# Altium PCB Battlebot_Controller.PcbDoc
Units mm, origin at the board's own origin, x right, y up, seen from the top; angles counter-clockwise.
Board outline 92.71 x 59.94 mm, 2 copper layers (Top Layer, Bottom Layer); 13 components, 19 nets, 70 pads, 26 vias.
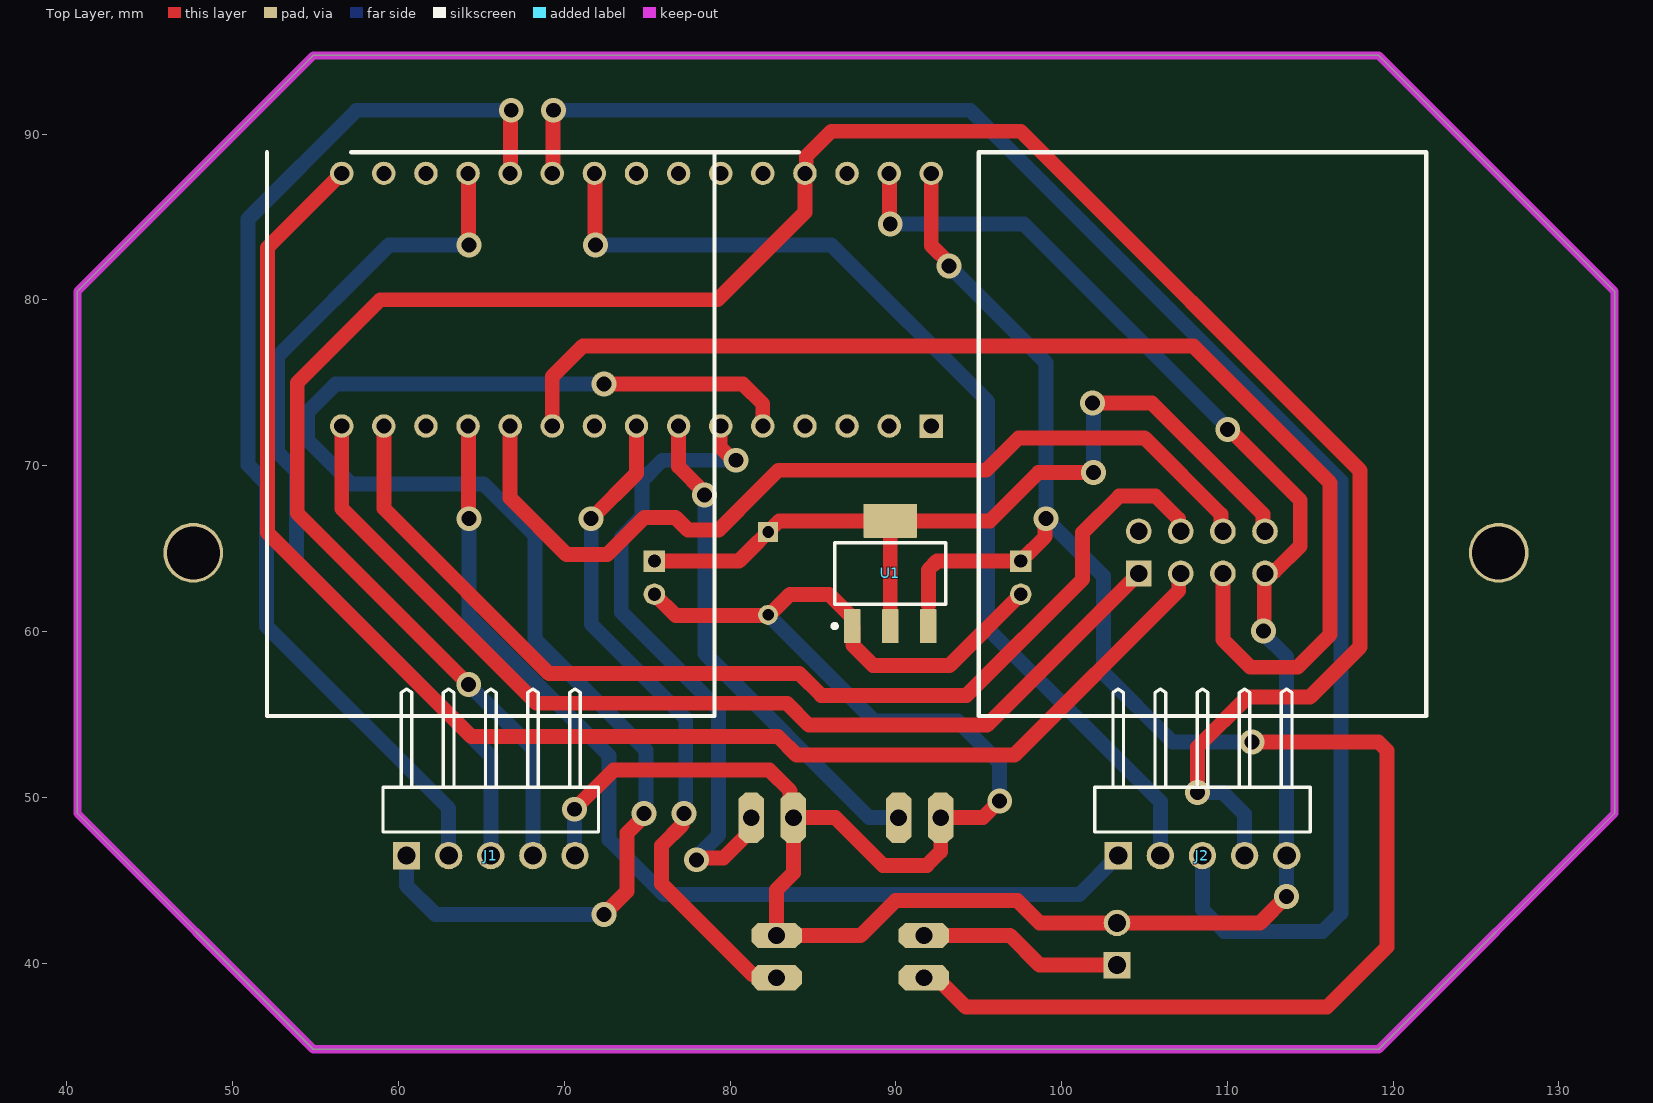
[diagram p0: Top Layer view]
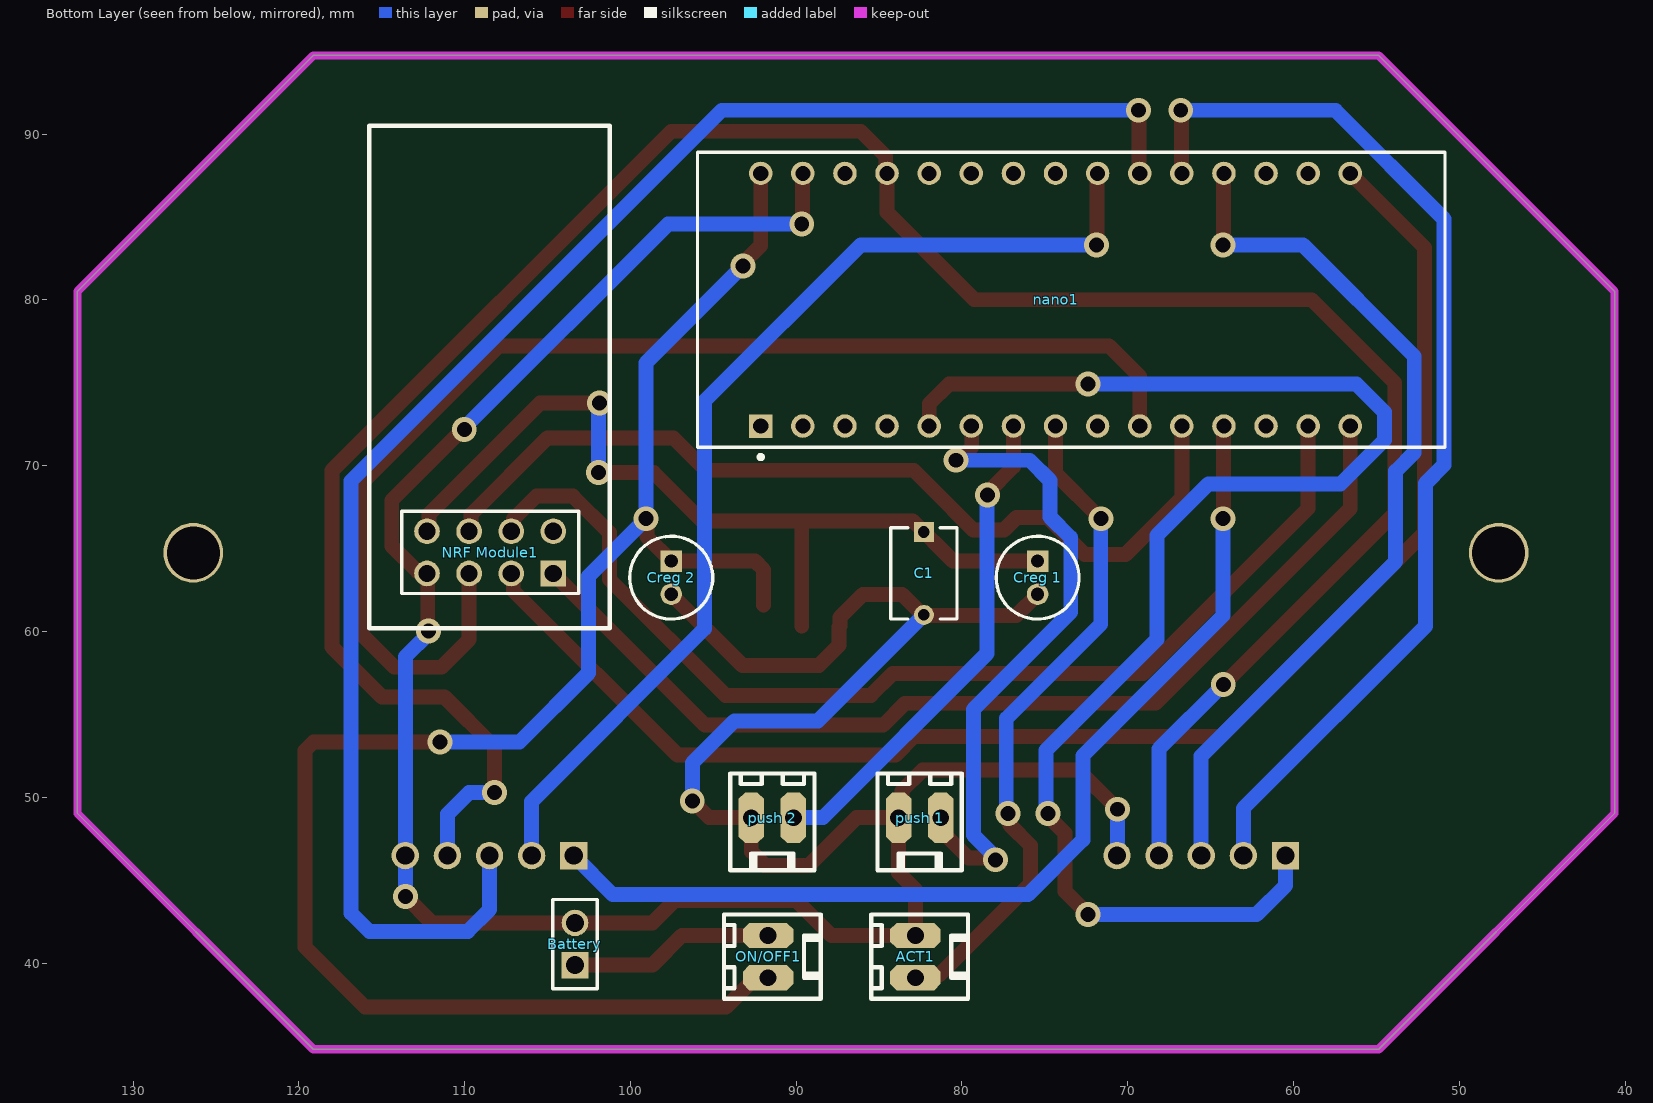
[diagram p1: Bottom Layer view, seen from below]
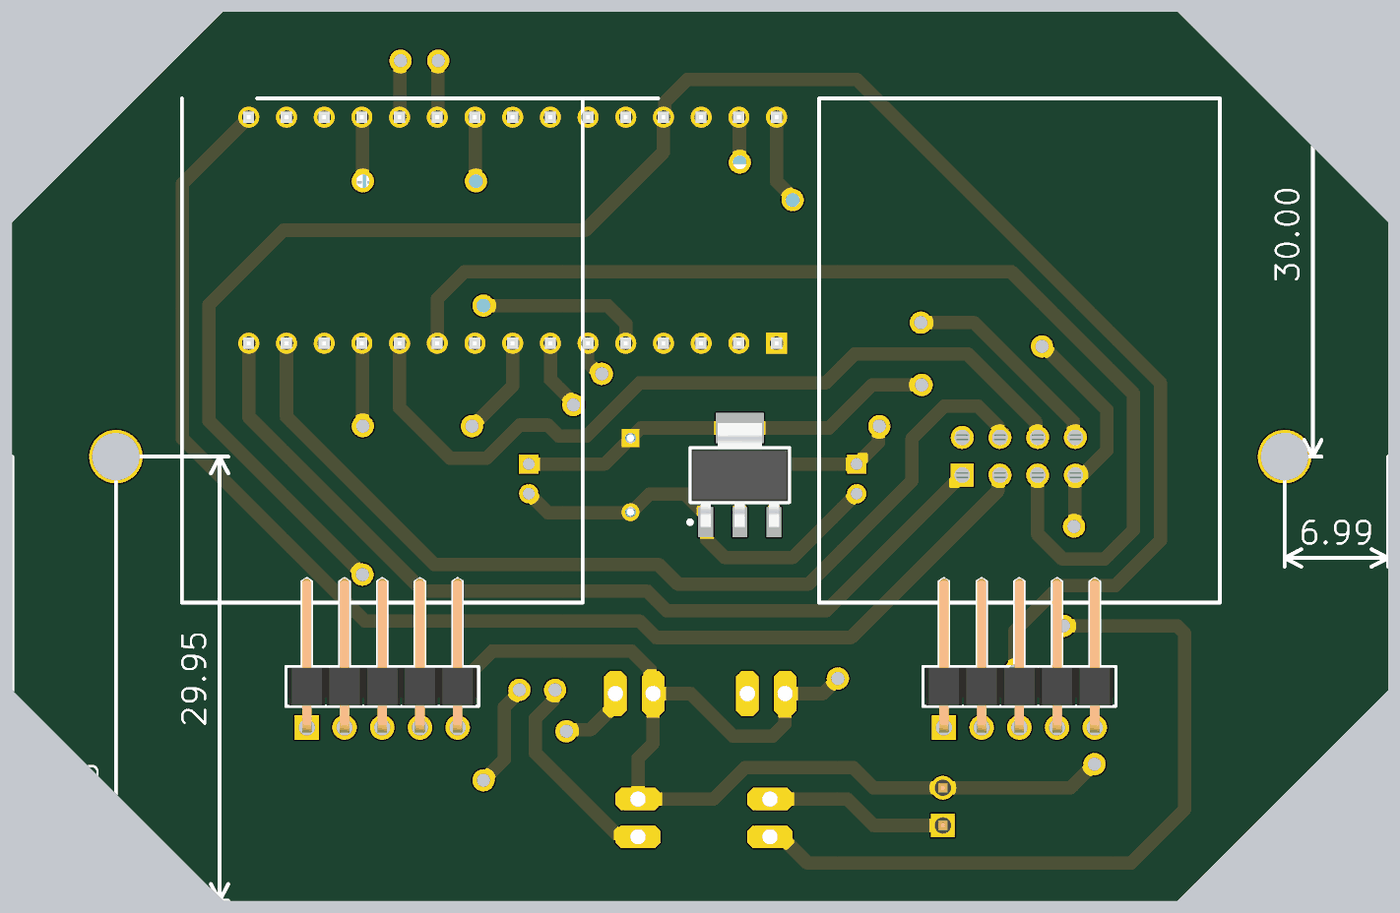
[diagram p2: 3D render of the assembled board from above, using the file's embedded part models]
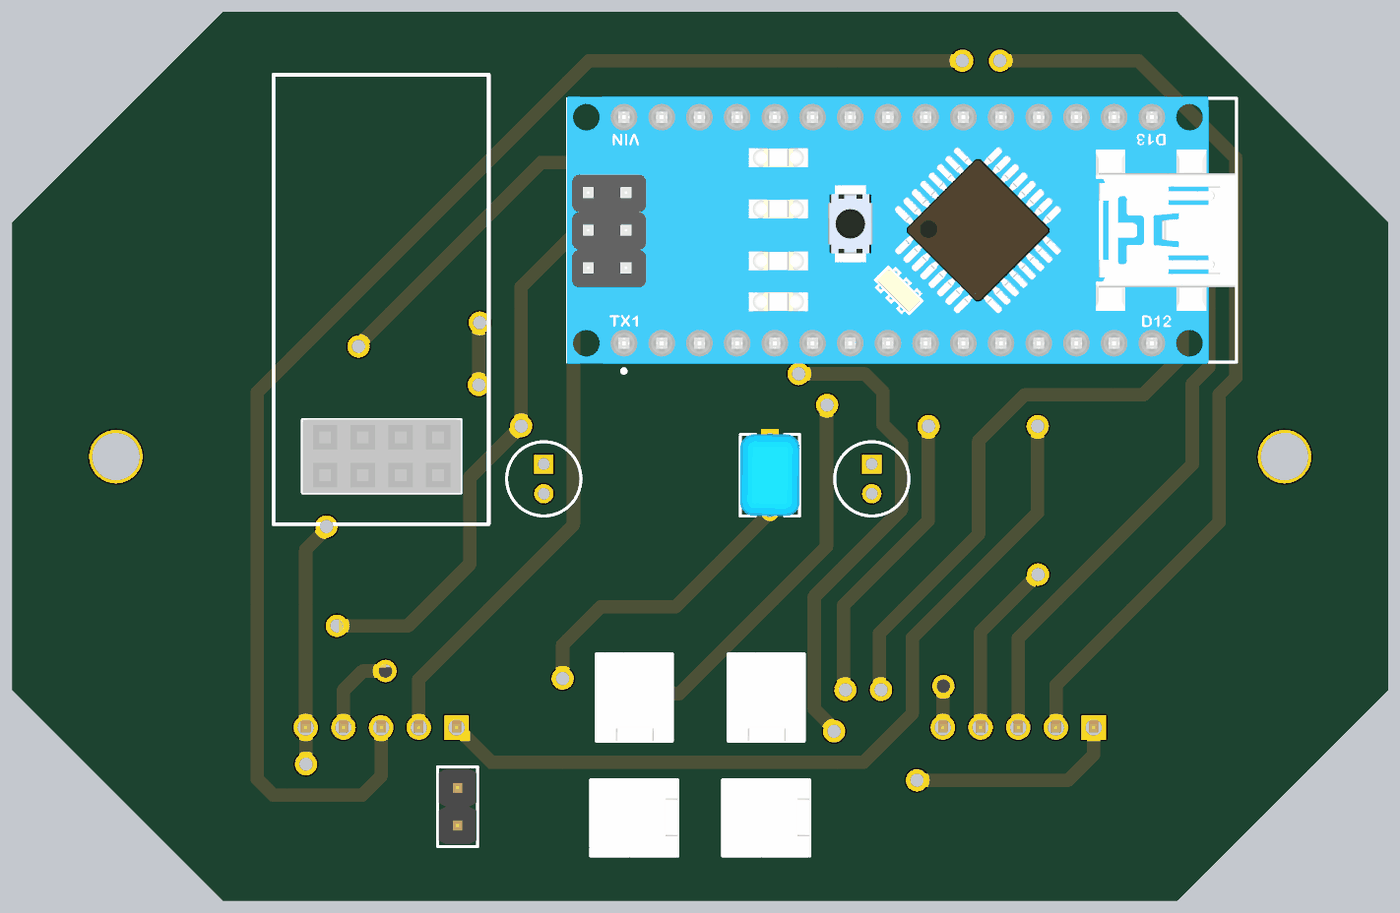
[diagram p3: 3D render of the assembled board from below, using the file's embedded part models]

## Layer stack, top to bottom
Top Solder: solder mask 0.0102, Solder Resist, Dk 3.5
Top Layer: signal copper 0.0356
Dielectric 1: dielectric 0.32, FR-4, Dk 4.8
Bottom Layer: signal copper 0.0356
Bottom Solder: solder mask 0.0102, Solder Resist, Dk 3.5

## Board outline
40.64,49.022 40.64,80.518 54.864,94.742 119.126,94.742 133.35,80.518 133.35,49.022 119.126,34.798 54.864,34.798

## Design rules (kind name [scope] priority, off if disabled: settings)
Clearance [All] p1: gap=0.9 ignorepadtopadclearanceinfootprint=TRUE
PolygonConnect [All] p1: connectstyle=Relief reliefconductorwidth=0.254 reliefentries=4 polygonreliefangle="90 Angle" airgapwidth=0.254
RoutingVias [All] p1: holewidth=0.9 width=1.5 viastyle="Through Hole" minholewidth=0.9 minwidth=1.5 maxholewidth=0.9 maxwidth=1.5
SolderMaskExpansion [All] p1: expansion=0.102 istentingtop=FALSE
Width [All] p1: maxlimit=2 minlimit=0.9 preferedwidth=0.9
30 further rules are at their usual default settings.

## Components (designator, comment, footprint, x,y, rotation, side; value= is the part's Value field where it differs from the comment)
ACT1 "Header 2" MY_6410-02 82.804,40.386 r270 bottom
Battery "61300211121" 61300211121 103.341,41.148 r90 bottom
C1 "RCER71H106MWK1H03B" FP-RCEWM1-MFG 82.296,63.5 r270 bottom
"Creg 1" "ECA1HM100" CAPPR55-200-1100X500X1200 75.438,63.246 r270 bottom
"Creg 2" "ECA1HM100" CAPPR55-200-1100X500X1200 97.536,63.246 r270 bottom
J1 "61300511021" 61300511021 65.57,49.252 r180 top
J2 "61300511021" 61300511021 108.496,49.252 r180 top
nano1 "A000005" FP-A000005-MFG 73.406,80.01 r90 bottom
"NRF Module1" "SSW-104-02-G-D" SMTC-SSW-104-02-X-D 104.648,63.5 r0 bottom locked
ON/OFF1 "Header 2" MY_6410-02 91.694,40.386 r270 bottom
"push 1" "Header 2" MY_6410-02 82.55,48.768 r0 bottom (schematic designator "Push 1")
"push 2" "Header 2" MY_6410-02 91.44,48.768 r0 bottom (schematic designator "Push 2")
U1 "AMS1117" DCY0004A_M 89.662,63.5 r90 top

## Footprints (in the part's own frame and the unit in brackets; to place one, negate y for a bottom-side part, rotate by r counter-clockwise, add the part's x,y. Pads: shape width x height; smd on the part's side, far side on the other; paste and mask are expansions set on the pad)
61300211121 [mm] "Pin Header, pitch 2.54 mm, THT, Vertical, single row, 2p"
  rect 1.6x1.6 hole 1.1: 1(-1.27,0)
  round 1.6 hole 1.1: 2(1.27,0)
  silkscreen extent -2.69,-1.35 2.69,1.35, body extent -2.54,-1.27 2.54,1.27, height 8.57
61300511021 [mm] "Pin Header, pitch 2.54 mm, THT, Angled, single row, 5p"
  rect 1.65x1.65 hole 1.1: 1(5.08,2.77)
  round 1.65 hole 1.1: 2(2.54,2.77) 3(0,2.77) 4(-2.54,2.77) 5(-5.08,2.77)
  silkscreen extent -6.5,-7.27 6.5,1.35, body extent -6.35,-7.27 6.35,3.09, height 2.58
CAPPR55-200-1100X500X1200 [mm] "THD, 2-Leads, Dia 5mm, Body Length 11mm"
  rect 1.3x1.3 hole 0.8: 1(-1,0)
  round 1.3 hole 0.8: 2(1,0)
  silkscreen extent -2.5,-2.5 2.5,2.5, body extent -2.5,-2.5 2.5,2.5, height 12
DCY0004A_M [mm] "SOT223, 4-Leads, Body 6.7x3.7mm, Pitch 2.3mm, IPC Low Density"
  rrect10% 2.05x1 smd: 1(-3.175,2.3) 2(-3.175,0) 3(-3.175,-2.3)
  rrect5% 2.05x3.25 smd: 4(3.175,0)
  silkscreen extent -3.3,-3.35 1.85,3.47, body extent -3.5,-3.25 3.5,3.25, height 1.62
FP-A000005-MFG [mil]
  rect 55.67x55.67 hole 35.98 paste-39370.1 mask+0: 1(-300,737.5)
  round 55.67 hole 35.98 paste-39370.1 mask+0: 2(-300,637.5) 3(-300,537.5) 4(-300,437.5) 5(-300,337.5) 6(-300,237.5) 7(-300,137.5) 8(-300,37.5) 9(-300,-62.5) 10(-300,-162.5) 11(-300,-262.5) 12(-300,-362.5) 13(-300,-462.5) 14(-300,-562.5) 15(-300,-662.5) 16(300,-662.5) 17(300,-562.5) 18(300,-462.5) 19(300,-362.5) 20(300,-262.5) 21(300,-162.5) 22(300,-62.5) 23(300,37.5) 24(300,137.5) 25(300,237.5) 26(300,337.5) 27(300,437.5) 28(300,537.5) 29(300,637.5) 30(300,737.5)
  silkscreen extent -379,-888 350,888, body extent -354,-884 354,888, height 488
FP-RCEWM1-MFG [mm]
  rect 1.2x1.2 hole 0.7 paste-1000 mask+0: 1(-2.5,0)
  round 1.2 hole 0.7 paste-1000 mask+0: 2(2.5,0)
  silkscreen extent -2.75,-2 2.75,2, body extent -2.75,-2 2.75,2, height 10
MY_6410-02 [mil]
  oct 60x120 hole 40: 1(50,0) 2(-50,0)
  silkscreen extent -100,-105 100,125, body extent -102,-102 99,126, height 449
SMTC-SSW-104-02-X-D [mm] "SQ Post Socket, 2x4 Pins, Vertical, 2.54mm Pitch, Female"
  rect 1.55x1.55 hole 1.04: 1(0,0)
  round 1.55 hole 1.04: 2(0,-2.54) 3(2.54,0) 4(2.54,-2.54) 5(5.08,0) 6(5.08,-2.54) 7(7.62,0) 8(7.62,-2.54)
  silkscreen extent -1.53,-3.74 9.15,1.2, body extent -1.52,-3.75 9.14,1.21, height 8.51

## Part data
ACT1 ON/OFF1 "push 1" "push 2": "Header, 2-Pin", ASiD Part Number="Header 2-AS"
Battery: library part CMP-1712-00002-4, "THT Vertical Pin Header WR-PHD, Pitch 2.54 mm, Single Row, 2 pins", Contact Resistance=20mOhm, Manufacturer="Wurth Elektronik", Operating Temperature=-40to105degC, Rated Current=3A, Withstanding Voltage=500VAC, Working Voltage=250VAC, Datasheet URL=https://katalog.we-online.de/em/datasheet/6130xx11121.pdf, Gender=Male, Manufacturer URL=http://www.we-online.de, Mounting Technology=THT, Orientation=Vertical, Package Reference=61300211121, Packaging=Bag, Part Number=61300211121, Pin Number=2, Pitch=2.54mm, Publisher=WurthElektronik, Row Number=Single
C1: library part CMP-06035-035073-1, "Cap Ceramic 10uF 50V X7R ±20% Radial 5mm +125°C Automotive Ammo Pack", Capacitance=10uF, Case/Package=Radial, Dielectric=X7R, Max Operating Temperature=125°C, Min Operating Temperature=-55°C, Package Quantity=500, Ratings=AEC-Q200, Resistor Type=Ceramic, Tolerance=20%, Voltage=50V, Depth=7.5mm, Diameter=5.5mm, Height=7.5mm, Height - Seated (Max)=0.295inch, Lead Diameter=0.5mm, Lead Free="Lead Free", Lead Pitch=0.197inch, Lead/Base Style="Formed Leads", Length=5.5mm, Mount="Through Hole", Packaging=Bulk, Termination=Radial, Voltage Rating=50V, Voltage Rating (DC)=50V, Width=4mm
"Creg 1" "Creg 2": library part CMP-1665-00038-2, "Aluminum Electrolytic Capacitor, 10 uF, +/- 20%, 50 V, -40 to 85 degC, 2-Pin THD, RoHS, Bulk", Capacitance=10uF, Case/Package=Radial, Dielectric Material=Aluminium, Leakage Current=3uA, Manufacturer=Panasonic, Max Operating Temperature=85degC, Min Operating Temperature=-40degC, Package Description="2-Pin Radial Lead, Dia 5 mm, Height 12 mm", Package Quantity=200, Package Reference=CAPPR55-200-1100X500X1200, Ripple Current=65mA, Tolerance=20%, Voltage=50V, Datasheet URL=https://industrial.panasonic.com/cdbs/www-data/pdf/RDF0000/ABA0000C1218.pdf, Datasheet Version="Rev. 05, 10/2016", Diameter=5mm, Dissipation Factor=0.12%, Height=11mm, Height - Seated (Max)=0.472inch, Lead Diameter=0.5mm, Lead Free=LeadFree, Lead Pitch=2mm, Lead/Base Style=Straight, Length=11mm, Life (Hours)=2000Hour, Manufacturer URL=http://www.panasonic.com/, Mount=ThroughHole, Number of Pins=2, Packaging=Bulk, Radiation Hardening=No, REACH SVHC=NoSVHC, Ripple Current (AC)=65mA, RoHSCompliant=true, Termination=Radial, Voltage Rating=50V, Voltage Rating (DC)=50V
J1 J2: library part CMP-1502-01067-1, "THT Angled Pin Header WR-PHD, Pitch 2.54 mm, Single Row, 5 pins", Contact Resistance=20mOhm, Manufacturer="Wurth Elektronik", Operating Temperature=-40to105degC, Rated Current=3A, Withstanding Voltage=500VAC, Working Voltage=250VAC, Datasheet URL=https://katalog.we-online.de/em/datasheet/6130xx11021.pdf, Gender=Male, Manufacturer URL=http://www.we-online.de, Mounting Technology=THT, Orientation=Angled, Package Reference=61300511021, Packaging=Bag, Part Number=61300511021, Pin Number=5, Pitch=2.54mm, Publisher=WurthElektronik, Row Number=Single
nano1: library part CMP-189986-000002-1, "ARDUINO NANO ATMEGA328 EVAL BRD", Operating Supply Voltage=12V, Package Quantity=50, Core Architecture=AVR, Data Bus Width=8b, Evaluation Kit=Yes, Height=0.25inch, Interface=I2C, Length=7inch, Number of Bits=8, Packaging=Bulk, REACH SVHC="No SVHC", Series="AVR® ATmega", Weight=0.358383oz, Width=5inch
"NRF Module1": library part CMP-1023-00343-1, "SQ Post Socket, Through-hole, Vertical, -55 to 125 degC, 2.54mm Pitch, 8-Pin, Female, RoHS", Manufacturer=Samtec, Temperature Range="-55 to 125 degC", ComponentLink1Description="Manufacturer URL", ComponentLink1URL=http://www.samtec.com, ComponentLink2Description=Datasheet, ComponentLink2URL=http://www.samtec.com/documents/webfiles/pdf/SSW_TH.PDF, ComponentLink3Description="Package Specification", ComponentLink3URL=http://www.samtec.com/documents/webfiles/cpdf/SSW-1XX-XX-XXX-X-XX-XXX-XX-MKT.pdf, DatasheetVersion=F-214, Mounting Technology=Through-hole, Orientation=Vertical, PackageDescription="Assembly, Socket Strip .016 X .031 Tail", PackageReference=SSW-104-02-X-D, PackageVersion="CA, 6/1987", PartNumber=SSW-104-02-G-D, Pitch="2.54 mm", RoHS=True
U1: library part CMP-019-00021-3, "Low-Dropout Linear Regulator, 800 mA, -40 to 125 degC, 4-Pin SOT-223 (DCY), Green (RoHS & no Sb/Br), Tape and Reel", Case/Package=SOT-223, Dropout Voltage=1.2V, Manufacturer="Texas Instruments", Max Input Voltage=15V, Max Operating Temperature=125°C, Max Ouput Current=800mA, Min Input Voltage=2.6V, Min Operating Temperature=-40°C, Nominal Output Voltage=5V, Package Description="4-Pin Small Outline Transistor, Body 6.5 x 3.5 mm, Pitch 2.3 mm", Package Reference=DCY0004A, Datasheet URL=http://www.ti.com/lit/ds/symlink/lm1117.pdf, Datasheet Version="SNOS412N, 01/2016", Manufacturer URL=http://www.ti.com/, Mounting Technology=SM, Output Current=800mA, Output Voltage=5V, Outputs=1, Packaging=TapeandReel, Pins=4, RoHS Compliant=True

## Free pads (board coordinates)
  round 3.6 hole 3.2: M(47.625,64.745) M(126.365,64.745)

## Via types
v1: diameter 1.5, hole 0.9, Top Layer to Bottom Layer, 26 vias

## Nets (pads, with @x,y where several pads share a name; then routed paths per layer and width w, separated by ;. In a path a pad name is that pad's centre, name@x,y a point inside that pad or via, vN(x,y) a via of type N, cw(c..) or ccw(c..) an arc to the next point about the centre after c; other vN are vias at no path point)
+3.3V: "Creg 1.1" "NRF Module1.8" C1.1 U1.2 U1.4 | length 53.4
  Top Layer w0.9: 75.438,64.246 80.542,64.246 82.971,66.675 U1.4 ; U1.2 U1.4 ; v1(101.854,73.778) 105.443,73.778 112.144,67.077 112.144,66.164 112.268,66.04 ; v1(101.914,69.578) 98.593,69.578 95.69,66.675 U1.4
  Bottom Layer w0.9: v1(101.854,73.778) 101.914,73.718 v1(101.914,69.578)
+5V: J1.4 J2.4 nano1.27 | length 146.8
  Top Layer w0.9: v1(64.237,56.792) 53.895,67.134 53.895,75.003 58.903,80.01 79.248,80.01 84.519,85.281 nano1.27 84.597,87.708 84.597,88.661 86.106,90.17 97.536,90.17 117.993,69.713 117.993,59.059 114.978,56.044 111.21,56.044 108.204,53.038 v1(108.204,50.292)
  Bottom Layer w0.9: v1(64.237,56.792) 68.11,52.919 J1.4 ; v1(108.204,50.292) 109.728,50.292 111.036,48.984 J2.4
+7.4V: Battery.1 ON/OFF1.2 | length 12.4
  Top Layer w0.9: ON/OFF1.2 96.893,41.656 98.671,39.878 Battery.1
D7: "NRF Module1.5" nano1.10 | length 75.2
  Top Layer w0.9: nano1.10 69.278,75.374 71.12,77.216 107.944,77.216 116.193,68.967 116.193,59.805 114.232,57.844 111.398,57.844 109.728,59.514 109.728,63.5
D8: "NRF Module1.6" nano1.11 | length 55.1
  Top Layer w0.9: nano1.11@66.739,72.292 66.739,68.045 70.14,64.643 72.593,64.643 74.828,66.878 76.708,66.878 77.46,66.126 79.319,66.126 80.55,67.356 80.55,67.363 82.91,69.723 95.453,69.723 97.408,71.678 104.997,71.678 109.604,67.071 109.604,66.164 109.728,66.04
D11: "NRF Module1.4" nano1.14 | length 65.4
  Top Layer w0.9: nano1.14@59.118,72.251 59.118,67.426 69.074,57.47 84.177,57.47 85.497,56.15 94.268,56.15 101.27,63.151 101.27,65.964 103.471,68.165 105.671,68.165 107.064,66.773 107.064,66.164 107.188,66.04
D12: "NRF Module1.1" nano1.15 | length 62.2
  Top Layer w0.9: nano1.15 56.578,67.42 68.329,55.67 83.432,55.67 84.752,54.35 95.498,54.35 104.648,63.5
D13: "NRF Module1.3" nano1.16 | length 89.2
  Top Layer w0.9: nano1.16 52.095,83.147 52.095,65.964 64.406,53.653 82.903,53.653 84.006,52.55 97.157,52.55 107.064,62.456 107.064,63.376 107.188,63.5
GND: "Creg 1.2" "Creg 2.2" "NRF Module1.7" "push 1.1" "push 2.1" ACT1.2 Battery.2 C1.2 J1.5 J2.5 nano1.29 U1.1 | length 183.1
  Top Layer w0.9: v1(70.612,49.276) 72.978,51.642 82.368,51.642 83.625,50.385 83.625,48.963 83.82,48.768 ; 75.438,62.246 76.724,60.96 C1.2@82.157,60.96 ; C1.2 82.377,61 83.607,62.23 85.982,62.23 87.362,60.85 U1.1 87.412,60.275 87.412,59.17 88.632,57.95 93.24,57.95 97.536,62.246 ; nano1.29 89.63,87.598 89.63,84.614 v1(89.662,84.582) ; v1(96.266,49.784) 95.25,48.768 92.71,48.768 92.71,46.736 91.868,45.894 89.23,45.894 86.356,48.768 83.82,48.768 ; v1(110.018,72.172) 110.133,72.172 114.393,67.912 114.393,65.16 112.858,63.624 ; v1(112.18,60.032) 112.224,60.076 112.224,63.456 112.268,63.5 ; v1(113.557,44.01) 111.965,42.418 Battery.2 98.677,42.418 97.327,43.768 89.992,43.768 87.88,41.656 ACT1.2 82.804,44.42 83.82,45.436 83.82,48.768
  Bottom Layer w0.9: v1(70.612,49.276) 70.631,49.257 70.631,46.501 J1.5 ; C1.2 88.686,54.61 93.726,54.61 96.266,52.07 v1(96.266,49.784) ; v1(89.662,84.582) 97.723,84.582 110.018,72.287 v1(110.018,72.172) ; v1(112.18,60.032) 112.18,59.87 113.576,58.474 J2.5 113.566,46.473 113.566,44.02 v1(113.557,44.01)
J1S: J1.1 nano1.5 | length 88.9
  Top Layer w0.9: v1(72.39,42.926) 73.787,44.323 73.787,47.835 74.812,48.86 v1(74.812,49.022) ; v1(72.39,74.93) 80.772,74.93 81.973,73.729 81.973,72.396 nano1.5
  Bottom Layer w0.9: J1.1 60.49,44.666 62.23,42.926 v1(72.39,42.926) ; v1(72.39,74.93) 56.209,74.93 54.521,73.242 54.521,71.538 57.157,68.902 65.132,68.902 68.238,65.796 68.238,59.524 74.927,52.835 74.927,49.137 v1(74.812,49.022)
J2S: J2.1 nano1.12 | length 61.5
  Top Layer w0.9: nano1.12 64.23,72.358 64.23,66.834 v1(64.262,66.802)
  Bottom Layer w0.9: v1(64.262,66.802) 64.262,60.954 72.712,52.504 72.712,47.43 76.014,44.128 101.062,44.128 J2.1
NetACT1_1: ACT1.1 nano1.8 | length 41
  Top Layer w0.9: v1(71.614,66.802) 71.628,66.802 74.358,69.532 nano1.8 ; v1(77.216,49.022) 77.101,48.907 77.101,48.321 75.878,47.098 75.878,44.768 81.335,39.311 82.609,39.311 ACT1.1
  Bottom Layer w0.9: v1(71.614,66.802) 71.628,66.788 71.628,60.441 77.331,54.738 77.331,49.137 v1(77.216,49.022)
NetJ1_2: J1.2 nano1.20 | length 65.8
  Top Layer w0.9: nano1.20 66.77,87.662 66.77,91.408 v1(66.802,91.44)
  Bottom Layer w0.9: J1.2 63.03,49.331 52.045,60.316 52.045,68.924 50.921,70.047 50.921,84.882 57.479,91.44 v1(66.802,91.44)
NetJ1_3: J1.3 nano1.19 | length 54.1
  Top Layer w0.9: nano1.19 64.23,87.598 64.23,83.344 v1(64.262,83.312)
  Bottom Layer w0.9: v1(64.262,83.312) 59.436,83.312 52.721,76.597 52.721,70.792 53.845,69.669 53.845,64.215 65.57,52.489 J1.3
NetJ2_2: J2.2 nano1.22 | length 63.6
  Top Layer w0.9: nano1.22 71.85,87.598 71.85,83.344 v1(71.882,83.312)
  Bottom Layer w0.9: v1(71.882,83.312) 86.106,83.312 95.536,73.882 95.536,60.166 105.956,49.746 J2.2
NetJ2_3: J2.3 nano1.21 | length 99.3
  Top Layer w0.9: nano1.21 69.31,87.662 69.31,91.408 v1(69.342,91.44)
  Bottom Layer w0.9: v1(69.342,91.44) 94.488,91.44 116.84,69.088 116.84,43.004 115.746,41.91 109.806,41.91 108.496,43.22 J2.3
Netnano1_6: "push 1.2" nano1.6 | length 39.9
  Top Layer w0.9: v1(77.978,46.228) 78.093,46.343 79.617,46.343 81.28,48.006 81.28,48.768 ; nano1.6 79.409,72.361 79.409,71.12 80.204,70.326 v1(80.366,70.326)
  Bottom Layer w0.9: v1(77.978,46.228) 77.978,46.39 79.316,47.728 79.316,55.298 73.438,61.176 73.438,65.656 74.692,66.91 74.692,69.104 75.914,70.326 v1(80.366,70.326)
Netnano1_7: "push 2.2" nano1.7 | length 30.2
  Top Layer w0.9: nano1.7 76.898,69.934 78.45,68.382 v1(78.45,68.226)
  Bottom Layer w0.9: v1(78.45,68.226) 78.486,68.189 78.486,58.674 88.392,48.768 89.858,48.768 90.17,48.768
Vin: "Creg 2.1" nano1.30 ON/OFF1.1 U1.3 | length 106.6
  Top Layer w0.9: ON/OFF1.1 92.456,39.116 94.234,37.338 115.998,37.338 119.634,40.974 119.634,52.813 119.107,53.34 v1(111.476,53.34) ; 91.962,61.595 91.962,63.719 92.489,64.246 97.536,64.246 99.007,65.717 99.007,66.749 v1(99.06,66.802) ; nano1.30 92.138,83.284 93.218,82.204 v1(93.218,82.042)
  Bottom Layer w0.9: v1(93.218,82.042) 99.06,76.2 v1(99.06,66.802) 102.523,63.339 102.523,57.497 106.68,53.34 v1(111.476,53.34)
pads on no net: "NRF Module1.2" nano1.1 nano1.2 nano1.3 nano1.4 nano1.9 nano1.13 nano1.17 nano1.18 nano1.23 nano1.24 nano1.25 nano1.26 nano1.28

## Keep-outs
Keep-Out Layer:
  the board outline again, w0.508

## Silkscreen, mask and mechanical layers (free items; w line width, h text height)
Top Overlay:
  lines w0.254: 52.07,88.9 52.07,54.9 79.07,54.9 79.07,88.9 ; 57.15,88.9 84.15,88.9 ; 94.996,54.9 121.996,54.9 121.996,88.9 94.996,88.9 94.996,54.9
Bottom Overlay:
  lines w0.254: 101.246,60.198 115.746,60.198 115.746,90.498 101.246,90.498 101.246,60.198

## Dimensions
47.625,64.745 to 40.64,49.022 on Top Overlay
47.625,64.745 to 54.864,34.798 on Top Overlay
126.365,64.745 to 119.126,94.742 on Top Overlay
126.365,64.745 to 133.35,80.518 on Top Overlay
133.35,34.798 to 133.35,94.742 on Mechanical 13
40.64,34.798 to 133.35,34.798 on Mechanical 13